# Altium PCB BlinkerOpposed.PcbDoc
Units mil, origin at the board's own origin, x right, y up, seen from the top; angles counter-clockwise.
Board outline 1750 x 1750 mil, 2 copper layers (Top Layer, Bottom Layer); 8 components, 7 nets, 28 pads, 3 vias.
Unrouted connection lines stored in the file: 1.
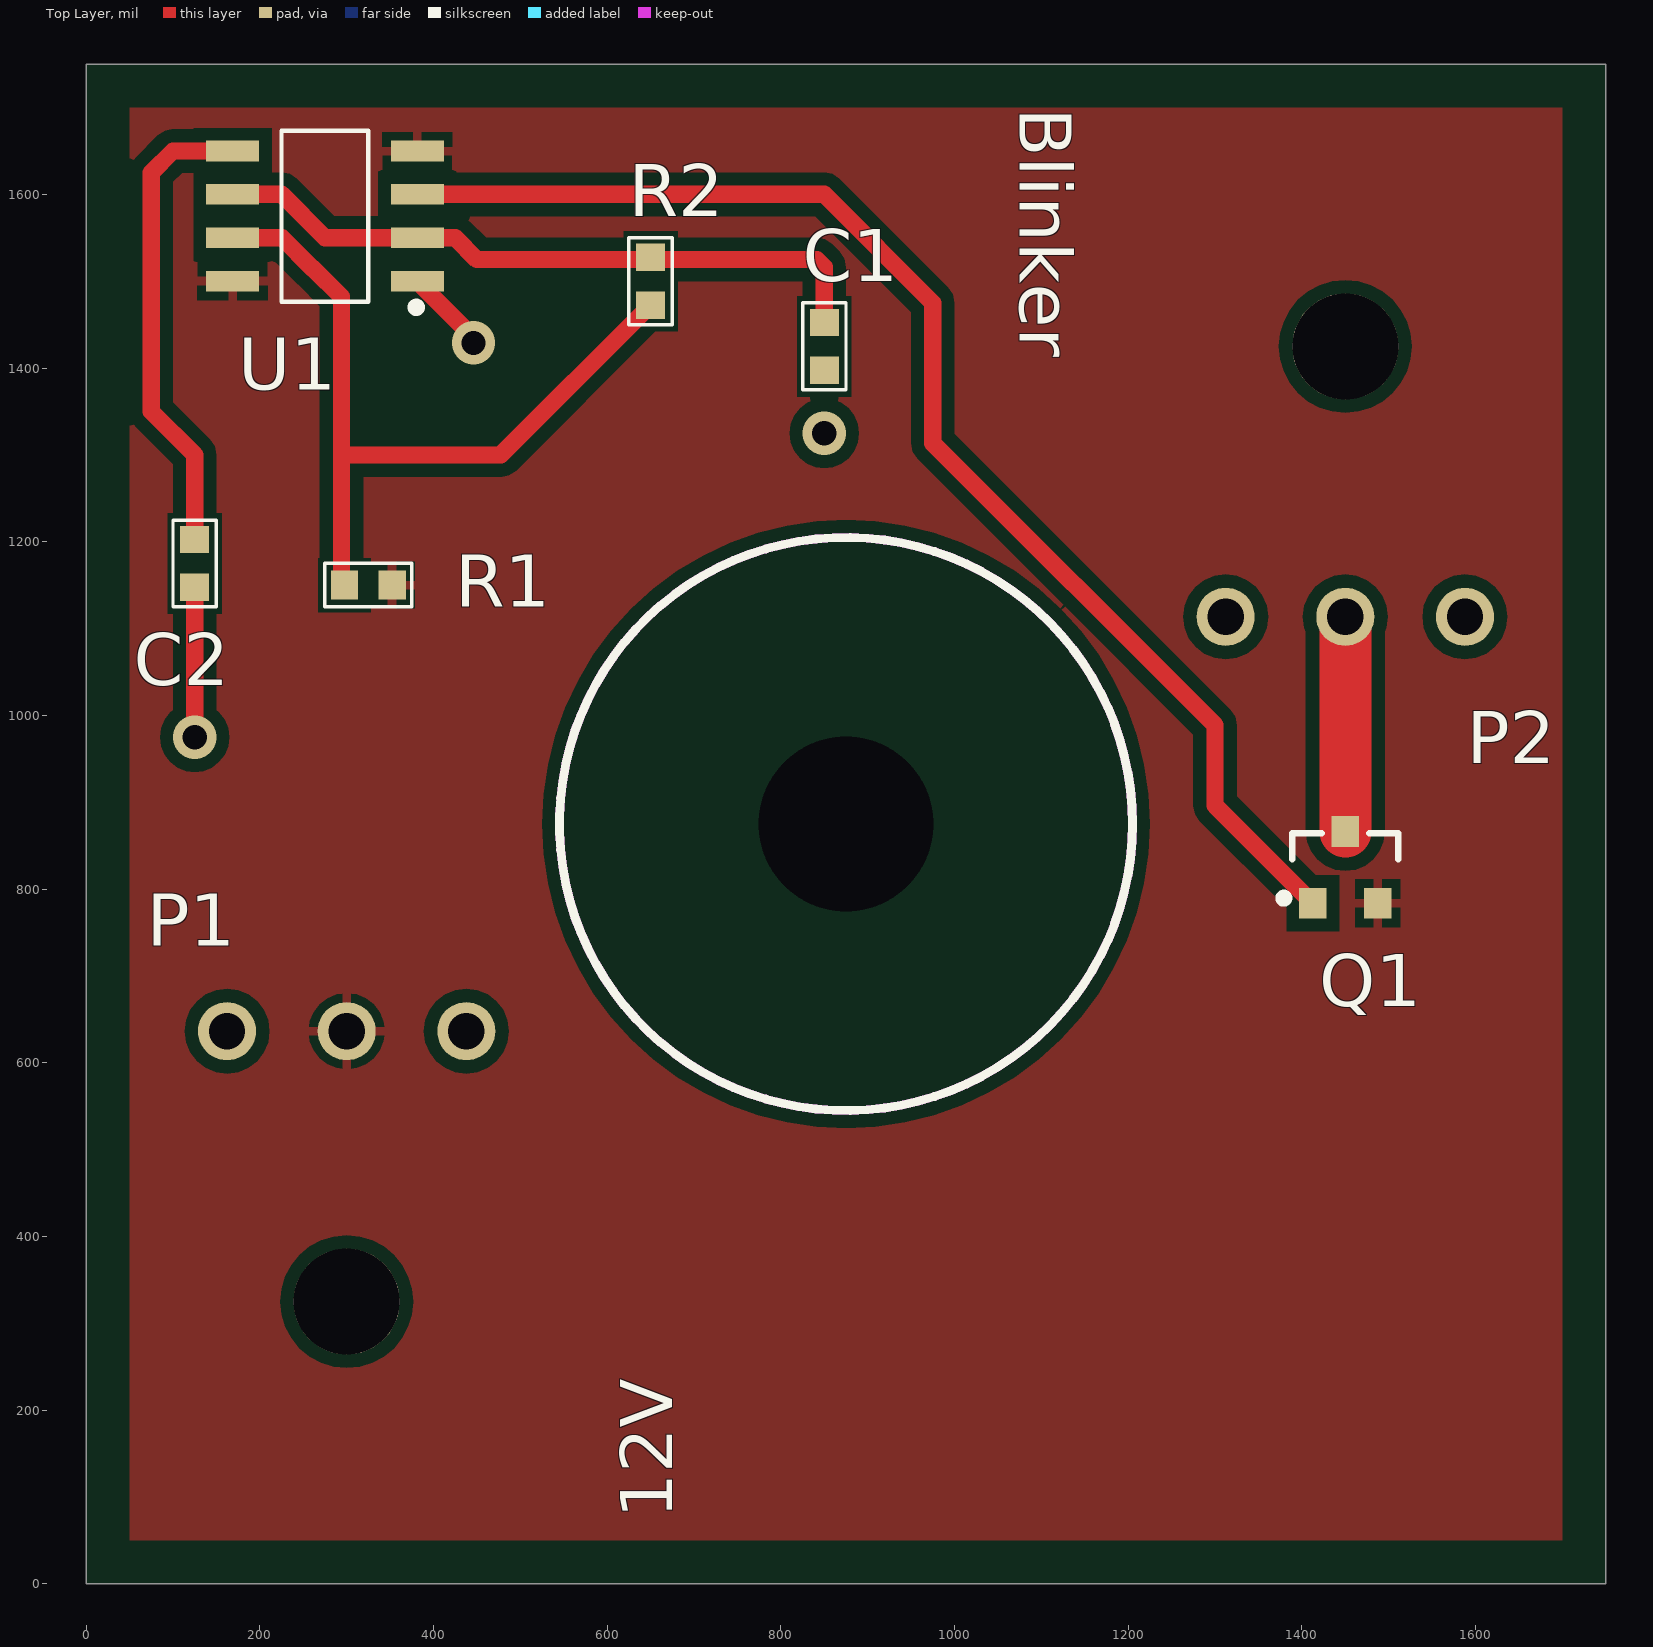
[diagram p0: Top Layer view]
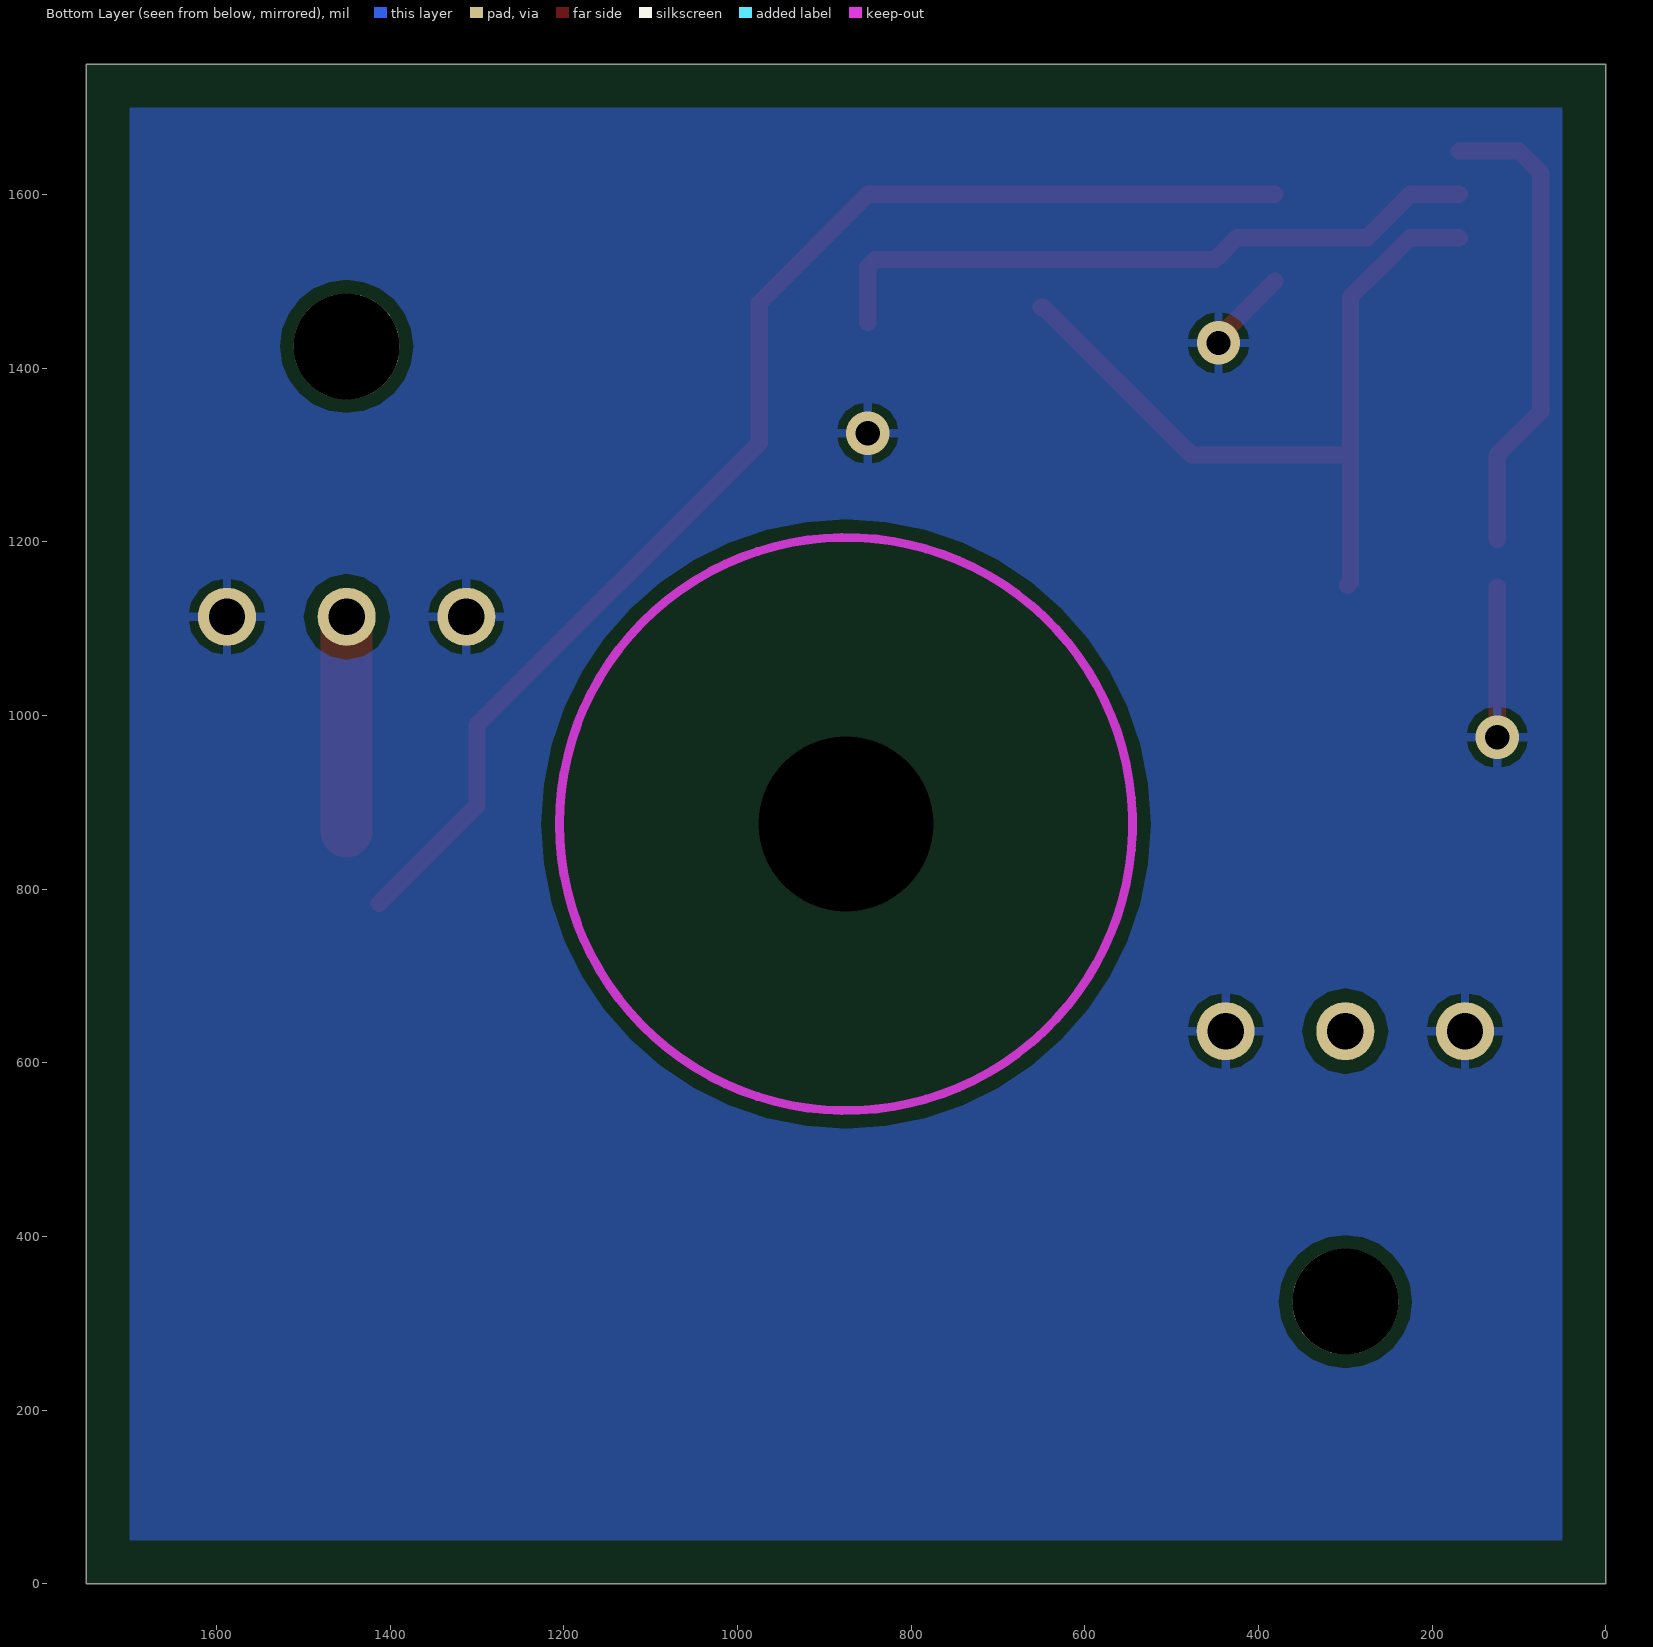
[diagram p1: Bottom Layer view, seen from below]

## Layer stack, top to bottom
Top Solder: solder mask 0.4, Solder Resist, Dk 3.5
Top Layer: signal copper 1.4
Dielectric 1: dielectric 12.6, FR-4, Dk 4.8
Bottom Layer: signal copper 1.4
Bottom Solder: solder mask 0.4, Solder Resist, Dk 3.5

## Board outline
0,1750 1750,1750 1750,0 0,0

## Design rules (kind name [scope] priority, off if disabled: settings)
Clearance [All] p1: gap=15 ignorepadtopadclearanceinfootprint=FALSE except(0: Arc-Hole Track-Hole SMDPad-Hole THPad-Hole Via-Hole Fill-Hole Poly-Hole Region-Hole Text-Hole)
PolygonConnect [All] p1: connectstyle=Relief reliefconductorwidth=10 reliefentries=4 polygonreliefangle="90 Angle" airgapwidth=10
RoutingVias [All] p1: holewidth=28 width=50 viastyle="Through Hole" minholewidth=28 minwidth=50 maxholewidth=28 maxwidth=50
SolderMaskExpansion [All] p1: expansion=4
Width [All] p1: maxlimit=60 minlimit=20 preferedwidth=40 minimp=50.000000 maximp=50.000000 favimp=50.000000
30 further rules are at their usual default settings.

## Components (designator, comment, footprint, x,y, rotation, side; value= is the part's Value field where it differs from the comment)
C1 "NPCAP" CAPC1608X06L 850,1425 r90 top value=4.7uF
C2 "NPCAP" CAPC1608X06L 125,1175 r90 top value=0.01uF
P1 "Molex Ultrafit 3x1" Molex-Ultrafit-3x1 300,325 r0 top
P2 "Molex Ultrafit 3x1" Molex-Ultrafit-3x1 1450,1425 r180 top
Q1 "PFET" SOT95P237X112-3N 1450,825 r90 top
R1 "RES" RESC1608X06L 325,1150 r0 top value=4.7k
R2 "RES" RESC1608X06L 650,1500 r270 top value=100k
U1 "LMC555CMx/LMC555CN/LMC555IM" D-8 275,1575 r90 top

## Footprints (in the part's own frame and the unit in brackets; to place one, negate y for a bottom-side part, rotate by r counter-clockwise, add the part's x,y. Pads: shape width x height; smd on the part's side, far side on the other; paste and mask are expansions set on the pad)
CAPC1608X06L [mm] "Chip Capacitor, 2-Leads, Body 1.60x0.80mm, IPC High Density"
  rect 0.8x0.85 smd: 1(-0.7,0) 2(0.7,0)
  silkscreen extent -1.27,-0.64 1.27,0.64, body extent -0.85,-0.45 0.85,0.45, height 0.55
D-8 [mm] "SOIC-8"
  rect 0.6x1.55 smd: 1(-1.905,-2.7) 2(-0.635,-2.7) 3(0.635,-2.7) 4(1.905,-2.7) 5(1.905,2.7) 6(0.635,2.7) 7(-0.635,2.7) 8(-1.905,2.7)
  silkscreen extent -2.79,-2.79 2.5,1.27, body extent -2.5,-2 2.5,2, height 1.75
Molex-Ultrafit-3x1 [mm] "Molex Ultrafit 3x1 - 172310-1303"
  round 3.1 hole 3.1 unplated: 0(0,0)
  round 1.7 hole 1.06: 1(-3.5,7.91) 2(0,7.91) 3(3.5,7.91)
  body extent -6.25,-7.33 6.25,8.3, height 8.96
RESC1608X06L [mm] "Chip Resistor, 2-Leads, Body 1.60x0.80mm, IPC High Density"
  rect 0.8x0.85 smd: 1(-0.7,0) 2(0.7,0)
  silkscreen extent -1.27,-0.64 1.27,0.64, body extent -0.85,-0.45 0.85,0.45, height 0.55
SOT95P237X112-3N [mm] "SOT23, 3-Leads, Body 2.92x2.37mm, Pitch 0.95mm, IPC Medium Density"
  rect 0.9x0.8 smd: 1(-1.05,0.95) 2(-1.05,-0.95) 3(1.05,0)
  silkscreen extent -1.02,-1.55 1,1.92, body extent -0.9,-1.45 0.9,1.45, height 0.8

## Part data
C1: "Nonpolar capacitor, 2 pin", Manufacturer="Samsung Electro-Mechanics", Part Number=CL10A475MA8NQNC
C2: "Nonpolar capacitor, 2 pin", Manufacturer="Samsung Electro-Mechanics", Part Number=CL10C103JA8NNNC
P1 P2: library part Molex-Ultrafit-3x1, "Molex Ultrafit 3x1 - 172310-1303", Manufacturer="Molex, LLC", Part Number=172310-1303
Q1: "MOSFET P CH 30V 6A 2-3Z1A", Manufacturer="Toshiba Semiconductor and Storage", Part Number=SSM3J332R,LF
R1: "Resistor, 2 pin", Manufacturer="Panasonic Electronic Components", Part Number=ERJ-3EKF4701V
R2: "Resistor, 2 pin", Manufacturer="Panasonic Electronic Components", Part Number=ERJ-3EKF1003V
U1: "555 Type, Timer/Oscillator (Single) IC 3MHz 8-SOIC", Manufacturer="Texas Instruments", Part Number=LMC555CMX/NOPB

## Free pads (board coordinates)
  round 0 hole 201: 3(875,875)

## Via types
v1: diameter 50, hole 28, Top Layer to Bottom Layer, 3 vias

## Nets (pads, with @x,y where several pads share a name; then routed paths per layer and width w, separated by ;. In a path a pad name is that pad's centre, name@x,y a point inside that pad or via, vN(x,y) a via of type N, cw(c..) or ccw(c..) an arc to the next point about the centre after c; other vN are vias at no path point)
12V: P1.2 Q1.2 R1.2 U1.4 U1.8
GND: C1.1 C2.1 P1.1 P1.3 P2.1 P2.3 U1.1 | length 270.2
  Top Layer w20: v1(125,975) C2.1 ; U1.1 446,1435.3 v1(446,1429)
  other v1: 850,1325
NetC1_2: C1.2 R2.1 U1.2 U1.6 | length 779.8
  Top Layer w20: U1.6 225,1600 275,1550 U1.2 425,1550 450,1525 841.39,1525 850,1516.39 C1.2
NetC2_2: C2.2 U1.5 | length 547.2
  Top Layer w20: C2.2 125,1300 75,1350 75,1625 100,1650 U1.5
NetP2_2: P2.2 Q1.3 | length 247.2
  Top Layer w60: Q1.3 P2.2
NetQ1_1: Q1.1 U1.3 | length 1518.1
  Top Layer w20: U1.3 850,1600 975,1475 975,1313.61 1300,988.61 1300,896.26 Q1.1
NetR1_1: R1.1 R2.2 U1.7 | length 913.3
  Top Layer w20: U1.7 225.5,1550 260.5,1515 261,1515 294,1482 294,1300 ; R1.1 294,1153.44 294,1300 ; R2.2@650,1470 647.56,1470 477.56,1300 294,1300
pads on no net: P1.0 P2.0

## Polygon pours and split planes (outlines as drawn)
GND on Bottom Layer "Top Layer-GND" (solid, remove dead copper, pour order 5): 50,1700 1700,1700 1700,50 50,50
12V on Top Layer "Top Layer-12V" (solid, remove dead copper, pour order 4): 50,1700 1700,1700 1700,50 50,50

## Keep-outs
Keep-Out Layer:
  circle w10: c875,875 r330

## Silkscreen, mask and mechanical layers (free items; w line width, h text height)
Top Overlay:
  circle w10: c875,875 r330
  text "Blinker" at 1075,1700 h60 r270
  text "12V" at 675,75 h60 r90